# EAGLE board I2C_LM324_OSC_RevA_v10 (EAGLE 9.7.0)
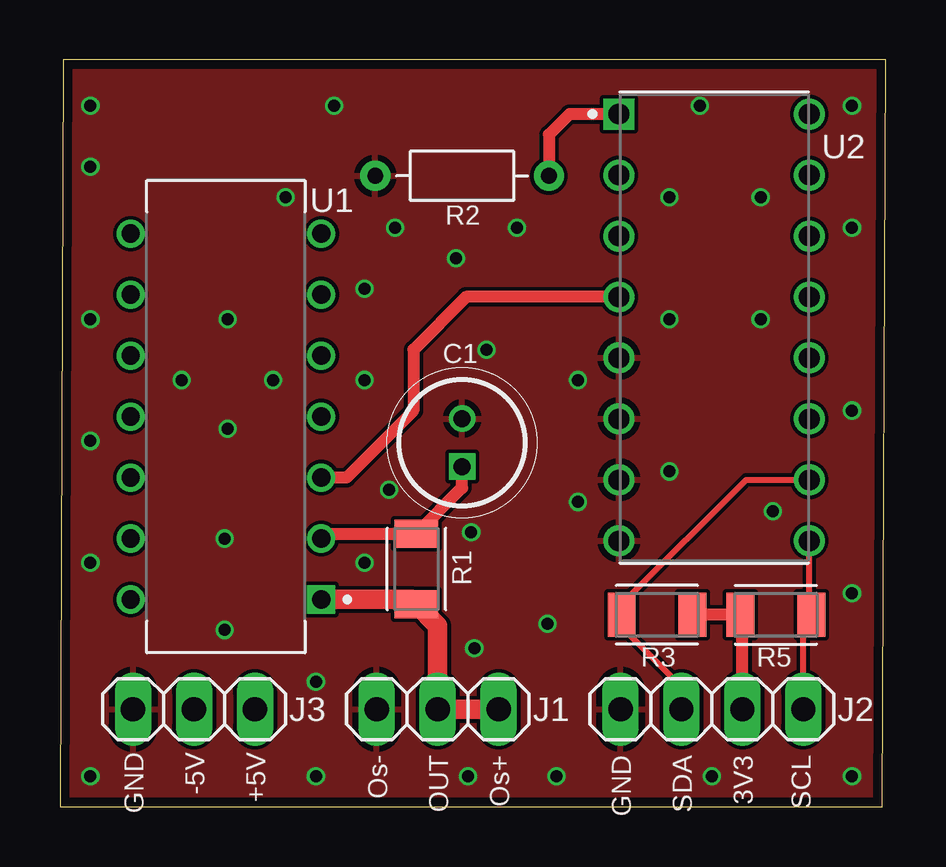
[diagram p0: board, top side]
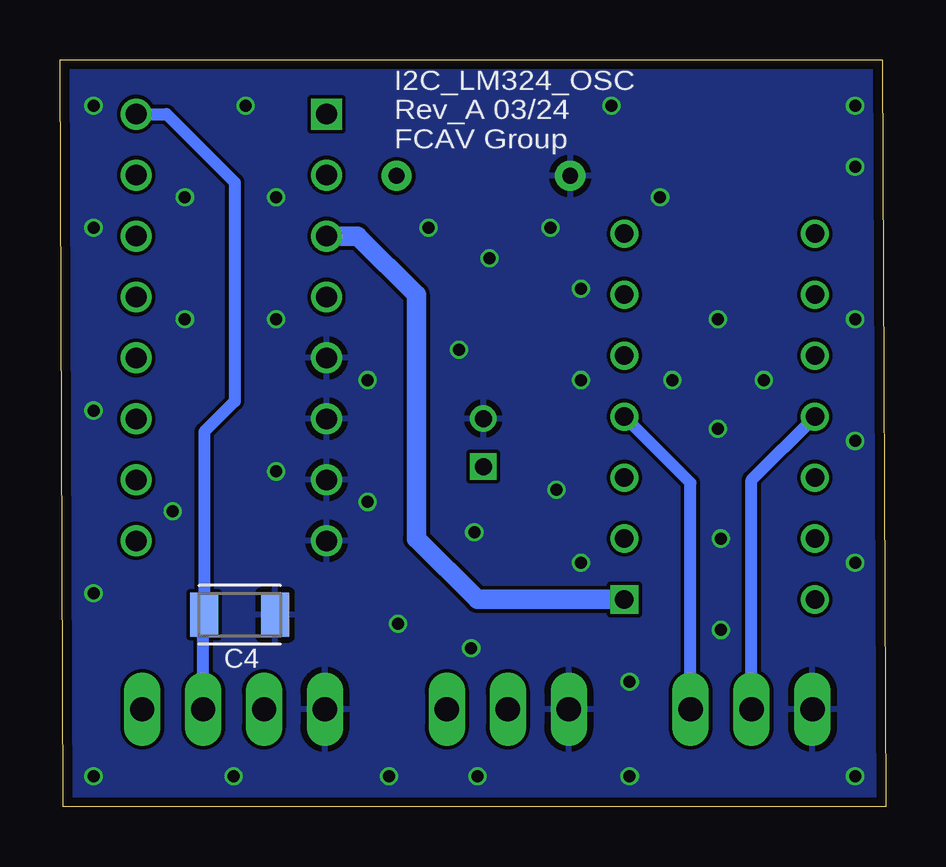
[diagram p1: board, bottom side, seen from below]

Size 34.42 x 31.11 mm. Coordinates in mm from the lower left corner, seen from the top.
Outline: 0,0 34.29,0 34.42,31.11 0.13,31.11 0,0
Copper layers (1*16): Top 0.035559375mm / dielectric 1.6mm / Bottom 0.035559375mm
Design rules "oshPark2Layer": minimum track width 6mil, minimum drill 10mil, track to track 6mil, track to pad 6mil, pad to pad 6mil, via to via 6mil, smd to smd 6mil, copper to edge 15mil, drill to drill 6mil, minimum pad ring 5mil, minimum via ring 5mil, stop-mask expansion 2.5mil, vias tented up to drill 0mil, thermal gap 10mil

## Footprints (pad centres in the part's own frame; a part is rotated, then mirrored left to right if it is on the bottom)
CAPPRD200W50D525H1250 = drill 0.7 pad 1.1 square: 1 0,0 | drill 0.7 pad 1.1: 2 2,0
CAPC3216X135 = smd 1.165 x 1.815: 1 -1.475,0; 2 1.475,0
1X03 = drill 1.016 long: 1 -2.54,0; 2 0,0; 3 2.54,0
1X04 = drill 1.016 long: 1 -3.81,0; 2 -1.27,0; 3 1.27,0; 4 3.81,0
RESC3216X70 = smd 1.165 x 1.815: 1 -1.475,0; 2 1.475,0
RESAD724W46L381D178B = drill 0.66 pad 1.26: 1 -3.62,0; 2 3.62,0
DIP794W45P254L1969H508Q14 = drill 0.77 pad 1.17 square: 1 -3.97,7.62 | drill 0.77 pad 1.17: 2 -3.97,5.08; 3 -3.97,2.54; 4 -3.97,0; 5 -3.97,-2.54; 6 -3.97,-5.08; 7 -3.97,-7.62; 8 3.97,-7.62; 9 3.97,-5.08; 10 3.97,-2.54; 11 3.97,0; 12 3.97,2.54; 13 3.97,5.08; 14 3.97,7.62
DIP794W47P254L1943H457Q16 = drill 0.86 pad 1.21 square: 1 -3.97,8.89 | drill 0.86 pad 1.21: 2 -3.97,6.35; 3 -3.97,3.81; 4 -3.97,1.27; 5 -3.97,-1.27; 6 -3.97,-3.81; 7 -3.97,-6.35; 8 -3.97,-8.89; 9 3.97,-8.89; 10 3.97,-6.35; 11 3.97,-3.81; 12 3.97,-1.27; 13 3.97,1.27; 14 3.97,3.81; 15 3.97,6.35; 16 3.97,8.89

## Placement (x,y rotation side)
C1  1uF  [CAPPRD200W50D525H1250]  16.76,14.17 90 top
C4  100nF  [CAPC3216X135]  26.92,8 0 bottom
J1  PINHD-1X3  [1X03]  15.75,4.06 180 top
J2  PINHD-1X4  [1X04]  27.18,4.06 180 top
J3  PINHD-1X3  [1X03]  5.59,4.06 180 top
R1  1k  [RESC3216X70]  14.86,9.91 270 top
R2  20k Photo  [RESAD724W46L381D178B]  16.76,26.29 0 top
R3  10k  [RESC3216X70]  24.89,8 0 top
R5  10k  [RESC3216X70]  29.84,8 180 top
U1  LM324N  [DIP794W45P254L1969H508Q14]  6.92,16.26 180 top
U2  DS18030-050+  [DIP794W47P254L1943H457Q16]  27.27,19.97 0 top

## Library data of the parts
C1 = REA010M2CBK-0511P; DESCRIPTION: Aluminum Electrolytic Capacitors - Radial Leaded 160V 1.0uF 20% 5x11mm; HEIGHT: 12.5mm; MANUFACTURER_NAME: Lelon; MANUFACTURER_PART_NUMBER: REA010M2CBK-0511P; MOUSER_PART_NUMBER: 140-REA1R0M2CBK0511P; MOUSER_PRICE-STOCK: https://www.mouser.co.uk/ProductDetail/Lelon/REA010M2CBK-0511P?qs=tsfqLUzc7IoVZpITlkTcwQ%3D%3D
C4 = Capacitor; CATEGORY: Capacitor
J1 J3 = Connector; CATEGORY: Headers; DESCRIPTION: Header, Straight, 3 Position; MANUFACTURER: Generic; MPN: Generic; OPERATING_TEMPERATURE: Generic; PART_STATUS: Active; PITCH: 0.100" (2.54mm); ROHS_COMPLIANCE: Generic; SERIES: Generic; SUB-CATEGORY: Headers, Male Pins; TYPE: Board to Board or Cable, Unshrouded, Through Hole, Straight
J2 = Connector; CATEGORY: Headers; DESCRIPTION: Header, Straight, 4 Position; MANUFACTURER: Generic; MPN: Generic; OPERATING_TEMPERATURE: Generic; PART_STATUS: Active; PITCH: 0.100" (2.54mm); ROHS_COMPLIANCE: Generic; SERIES: Generic; SUB-CATEGORY: Headers, Male Pins; TYPE: Board to Board or Cable, Unshrouded, Through Hole, Straight
R1-R3 R5 = Resistor; CATEGORY: Resistor; SUB-CATEGORY: Fixed
U1 = LM324N; AVAILABILITY: In Stock; CHECK_PRICES: https://www.snapeda.com/parts/LM324N/STMicroelectronics/view-part/?ref=eda; DESCRIPTION: Operational amplifier; 3÷32VDC; Channels: 4; DIP14; MF: STMicroelectronics; MP: LM324N; PACKAGE: DIP-14 Motorola; PRICE: None; PURCHASE-URL: https://www.snapeda.com/api/url_track_click_mouser/?unipart_id=18365&manufacturer=STMicroelectronics&part_name=LM324N&search_term=None; SNAPEDA_LINK: https://www.snapeda.com/parts/LM324N/STMicroelectronics/view-part/?ref=snap
U2 = DS18030-050_; AVAILABILITY: In Stock; CHECK_PRICES: https://www.snapeda.com/parts/DS18030-050+/Maxim+Integrated/view-part/?ref=eda; DESCRIPTION: Digital Potentiometer 50kOhm 256POS Volatile Linear 16-Pin PDIP N Tube; MF: Maxim Integrated Products; MP: DS18030-050+; PACKAGE: None; PRICE: None; SNAPEDA_LINK: https://www.snapeda.com/parts/DS18030-050+/Maxim+Integrated/view-part/?ref=snap

## Nets
+3V3: C4.1 J2.2 R3.2 R5.2 U2.16
+5V: J3.1 U1.4
-5V: J3.2 U1.11
GND: C1.2 C4.2 J1.3 J2.4 J3.3 R2.1 U2.5 U2.6 U2.7 U2.8
H_PHOTO: R2.2 U2.1
IN-: C1.1 R1.1 U1.2
OUT: J1.1 J1.2 R1.2 U1.1 U2.3
SCL: J2.1 R5.1 U2.9
SDA: J2.3 R3.1 U2.10
W_1IN+: U1.3 U2.4

## Tracks (layer width: path | path; a pad name or v marks a point on that pad's centre or on a via)
+3V3
  Top 0.508: R3.2 R5.2 28.45,7.92 J2.2
  Bottom 0.508: J2.2 28.45,7.95 C4.1 28.4,15.62 27.13,16.89 27.13,26.02 29.97,28.86 U2.16
+5V
  Bottom 0.508: J3.1 8.13,13.5 U1.4
-5V
  Bottom 0.508: J3.2 5.59,13.62 U1.11
GND  (via drill 0.5)
  other vias: 1.27,1.27 20.7,1.27 1.27,20.32 10.67,1.27 1.27,10.16 33.02,16.51 33.02,8.89 33.02,1.27 20.32,7.62 25.4,13.97 25.4,20.32 25.4,25.4 16.51,22.86 1.27,29.21 12.7,10.16 21.59,12.7 21.59,17.78 12.7,21.59 12.7,17.78 10.67,5.21 8.89,17.78 5.08,17.78 6.99,20.32 9.4,25.4 13.97,24.13 1.27,26.67 17.14,11.43 17.78,19.05 17.02,1.27 17.27,6.6 13.72,13.21 6.86,11.18 6.86,7.37 1.27,15.24 6.99,15.75 29.21,20.32 29.21,25.4 29.72,12.32 27.18,1.27 33.02,24.13 33.02,29.21 26.67,29.21 11.43,29.21 19.05,24.13
  pour Top: 0.2,0.08 34.34,0.08 34.34,31.04 0.2,31.04
  pour Bottom: 0.2,0.08 34.34,0.08 34.34,31.04 0.2,31.04
H_PHOTO
  Top 0.508: U2.1 21.24,28.86 20.38,28 R2.2
IN-
  Top 0.508: U1.2 11.09,11.38 R1.1 16.76,13.29 C1.1
OUT
  Top 0.813: U1.1 14.65,8.64 R1.2 15.75,7.54 J1.2 J1.1
  Bottom 0.813: U2.3 22,23.78 19.56,21.34 19.56,11.18 17.02,8.64 U1.1
SCL
  Top 0.254: U2.9 31.24,8.08 R5.1 30.99,7.67 J2.1
SDA
  Top 0.254: U2.10 28.61,13.62 23.62,8.64 23.62,8.21 R3.1 23.42,7.49 25.91,5 J2.3
W_1IN+
  Top 0.508: U2.4 16.92,21.24 14.73,19.05 14.73,16.51 11.94,13.72 U1.3

## Text on the board
tPlace: U2 | U1 | R2 | C1 | R1 | R3 | R5 | J3 | J1 | J2 | GND | -5V | +5V | Os- | OUT | Os+ | GND | SDA | 3V3 | SCL
bPlace: I2C_LM324_OSC / Rev_A 03/24 / FCAV Group | C4